# Altium PCB Driver.PcbDoc
Units mm, origin at the board's own origin, x right, y up, seen from the top; angles counter-clockwise.
Board outline 50.3 x 55.5 mm, 2 copper layers (Top Layer, Bottom Layer); 21 components, 12 nets, 64 pads, 4 vias.
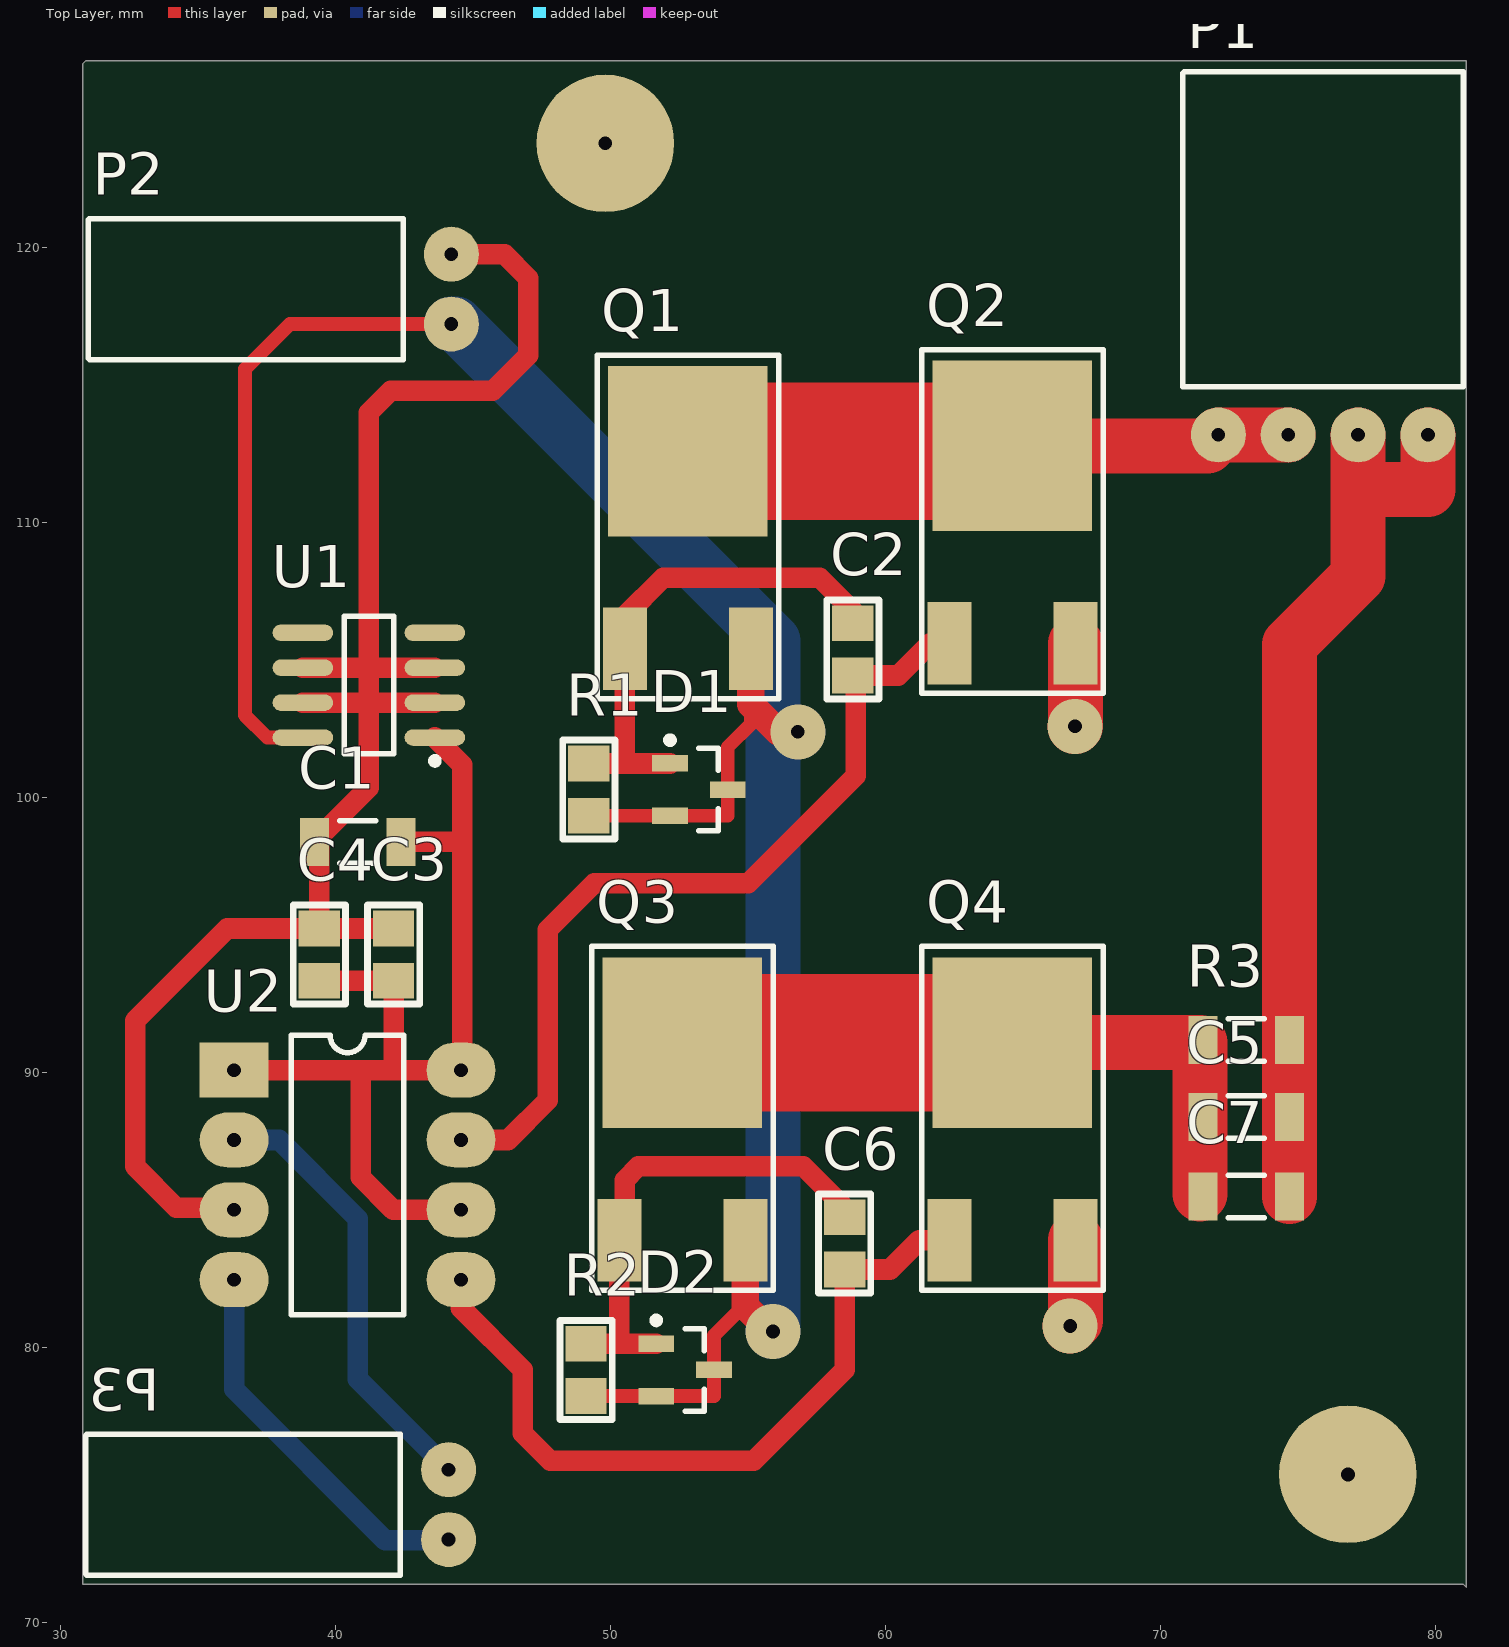
[diagram p0: Top Layer view]
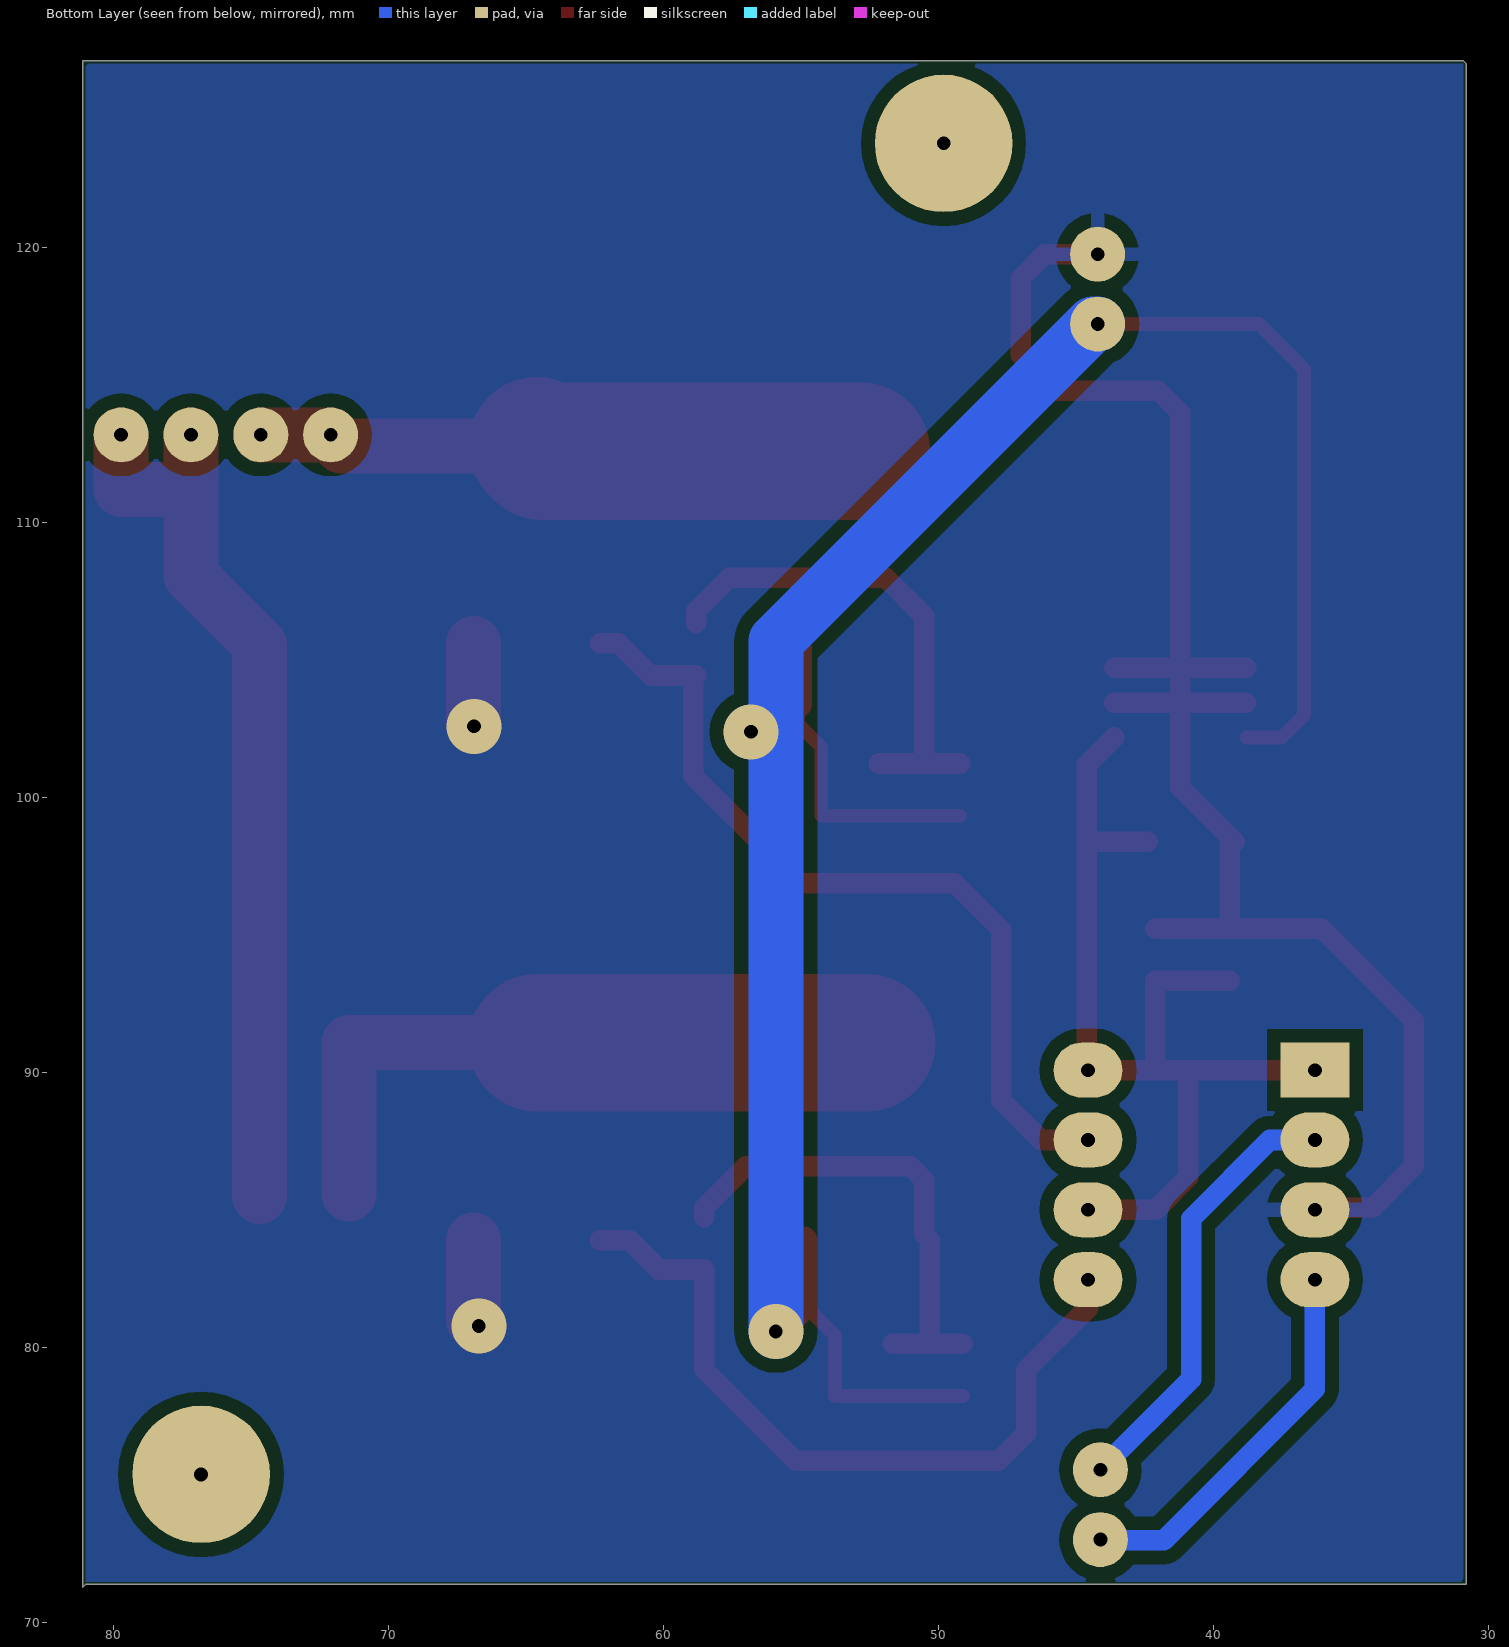
[diagram p1: Bottom Layer view, seen from below]

## Layer stack, top to bottom
Top Layer: signal copper 0.0356
Dielectric: dielectric 0.32, FR-4, Dk 4.8
Bottom Layer: signal copper 0.0356

## Board outline
30.8,126.7 30.9,126.8 81.1,126.8 81.1,71.3 81,71.4 30.8,71.4

## Design rules (kind name [scope] priority, off if disabled: settings)
Clearance "Clearance_GND_VCC +3.3" [InNet('GND') vs InNet('VCC +3.3')] p1 off: gap=0.2
Clearance Clearance_U3_Trace [(IsTrack  And IsNet)  And InRegion(3815,3770 ,4275 ,4280) vs (IsTrack  And IsNet)  And InRegion(3815,3770 ,4275 ,4280)] p2: gap=0.2
Clearance Clearance_QFP_NET [InNet('SPI_MISO/DO','SPI_MOSI/DI','GND','VCC','GDO2','GDO0','SPI_SS','SPI_SCK','NetC3_1','NetC2_1','GND','NetC1_2','NetANT1_1','NetR1_2')  And InRegion(3815,3770 ,4275 ,4280) vs InNet('SPI_MISO','SPI_MOSI','GND','VCC','GDO2','GDO0','SPI_SS','SPI_SCK','NetC3_1','NetC2_1','GND')  And InRegion(3815,3770 ,4275 ,4280)] p3: gap=0.2
Clearance Clearance_QFP_Pins [InComponent('U1') And IsPad] p4: gap=0.2
Clearance Clearance_GND [InPolygon] p5: gap=0.5
Clearance [All] p6: gap=0.3
ComponentClearance ComponentClearance_R1_C10 [InComponent('C10') vs InComponent('R1')] p1 off: gap=0 collisioncheckmode=3 verticalgap=0 showdistances=FALSE
ComponentClearance [All] p2 off: gap=0.3 collisioncheckmode=3 verticalgap=0.3 showdistances=FALSE
HoleSize [All] p1: absolutevalues=TRUE maxlimit=5 minlimit=0.3 maxpercent=80.000 minpercent=20.000
NetAntennae [All] p1: netantennaetolerance=50
PlaneConnect [All] p1: planeconnectstyle=Relief reliefexpansion=0.508 reliefentries=4 reliefconductorwidth=0.3 reliefairgap=0.3
PolygonConnect [All] p1: connectstyle=Relief reliefconductorwidth=0.5 reliefentries=4 polygonreliefangle="90 Angle"
RoutingCorners [All] p1: cornerstyle=45-Degree minsetback=2.54 maxsetback=5
RoutingVias [All] p1: holewidth=0.5 width=1.6 viastyle="Through Hole" minholewidth=0.3 minwidth=1 maxholewidth=1 maxwidth=2
ShortCircuit ShortCircuit_ANT1 [InComponent('ANT1')] p1: allowed=TRUE
ShortCircuit [All] p2: allowed=FALSE
SilkToSilkClearance [All] p1: silktosilkclearance=0.3
SilkscreenOverComponentPads [All] p1: minsilkscreentomaskgap=0.254
SolderMaskExpansion [All] p1: expansion=0.102
Width [All] p1: maxlimit=15 minlimit=0.2 preferedwidth=0.3
20 further rules are at their usual default settings.

## Components (designator, comment, footprint, x,y, rotation, side; value= is the part's Value field where it differs from the comment)
C1 "SMD_1206" SMD-1206 40.8,98.4 r180 top
C2 "KONDENS_SMD" C0805 58.8,105.4 r270 top
C3 "KONDENS_SMD" C0805 42.1,94.3 r270 top
C4 "KONDENS_SMD" C0805 39.4,94.3 r270 top
C5 "SMD_1206" SMD-1206 73.1,88.4 r0 top
C6 "KONDENS_SMD" C0805 58.5,83.8 r270 top
C7 "SMD_1206" SMD-1206 73.1,85.5 r0 top
D1 "BAT54S" SOT23_N 53.2,100.3 r0 top
D2 "BAT54S" SOT23_N 52.7,79.2 r0 top
P1 "WF-04MR" WF-04MR 75.9,113.2 r0 top
P2 "WF-02MR" WF-02MR 44.2,118.5 r90 top
P3 "WF-02MR" WF-02MR 44.1,74.3 r270 top
Q1 "NTD20P06L" DPAK 52.8,112.6 r0 top
Q2 "NTD20N06L" DPAK 64.6,112.8 r0 top
Q3 "NTD20P06L" DPAK 52.6,91.1 r0 top
Q4 "NTD20N06L" DPAK 64.6,91.1 r0 top
R1 "RES" C0805 49.2,100.3 r270 top
R2 "RES" C0805 49.1,79.2 r270 top
R3 "1206" SMD-1206 73.1,91.2 r180 top
U1 "MC78L09ACD" 751-05_N 41.2,104.1 r180 top
U2 "UCC27423" PDIP 36.3,90.1 r0 top

## Footprints (in the part's own frame and the unit in brackets; to place one, negate y for a bottom-side part, rotate by r counter-clockwise, add the part's x,y. Pads: shape width x height; smd on the part's side, far side on the other; paste and mask are expansions set on the pad)
751-05_N [mm] "SOIC, 8-Leads, Body 4.9x3.9mm, Pitch 1.27mm, IPC Medium Density"
  oval 2.2x0.6 smd: 1(-2.4,1.905) 2(-2.4,0.635) 3(-2.4,-0.635) 4(-2.4,-1.905) 5(2.4,-1.905) 6(2.4,-0.635) 7(2.4,0.635) 8(2.4,1.905)
  silkscreen extent -2.53,-2.5 0.9,2.88, body extent -1.95,-2.45 1.95,2.45, height 1.75
C0805 [mm]
  rect 1.3x1.5 smd: 1(-0.95,0) 2(0.95,0)
  silkscreen extent -1.8,-0.95 1.8,0.95
DPAK [mm]
  rect 5.8x6.2 smd: D(0,0)
  rect 1.6x3 smd: G(-2.29,-7.18) S(2.29,-7.18)
  silkscreen extent -3.3,-9 3.3,3.5
PDIP [mm]
  rect 2.5x2 hole 0.5: 1(0,0)
  oval 2.5x2 hole 0.5: 2(0,-2.54) 3(0,-5.08) 4(0,-7.62) 5(8.25,-7.62) 6(8.25,-5.08) 7(8.25,-2.54) 8(8.25,0)
  silkscreen extent 2.08,-8.89 6.16,1.27
SMD-1206 [mm] "Chip Resistor, 2-Leads, Body 3,3x1,6mm, IPC Medium Density"
  rect 1.05x1.75 smd: 1(-1.575,0) 2(1.575,0)
  silkscreen extent -0.65,-0.77 0.65,0.77, body extent -1.65,-0.81 1.65,0.81, height 0.5
SOT23_N [mm] "SOT23, 3-Leads, Body 2.9x1.3mm, Pitch 0.95mm, Lead Span 2.3mm, IPC Medium Density"
  rect 1.3x0.6 smd: 1(-1.05,0.95) 2(-1.05,-0.95) 3(1.05,0)
  silkscreen extent -1.17,-1.5 0.7,1.92, body extent -0.7,-1.5 0.7,1.5, height 1.1
WF-02MR [mm]
  round 2 hole 0.5: 1(-1.27,0) 2(1.27,0)
  silkscreen extent -2.56,1.75 2.56,13.2
WF-04MR [mm]
  round 2 hole 0.5: 1(-3.81,0) 2(-1.27,0) 3(1.27,0) 4(3.81,0)
  silkscreen extent -5.1,1.75 5.1,13.2

## Part data
C1 C5 C7: library part "Capasitor SMD_1206"
D1 D2: "Schottky Barrier Double Diode"
R1 R2: "Resistor"
R3: library part "Resistor SMD_1206"
U1: "Three-Terminal Low Current Positive Voltage Regulator"

## Free pads (board coordinates)
  round 5 hole 0.5: 0(76.8,75.4) 1(49.8,123.8)

## Via types
v1: diameter 2, hole 0.5, Top Layer to Bottom Layer, 4 vias

## Nets (pads, with @x,y where several pads share a name; then routed paths per layer and width w, separated by ;. In a path a pad name is that pad's centre, name@x,y a point inside that pad or via, vN(x,y) a via of type N, cw(c..) or ccw(c..) an arc to the next point about the centre after c; other vN are vias at no path point)
GND: C1.2 C3.1 C4.1 P2.2 Q2.S Q4.S U1.2 U1.3 U1.6 U1.7 U2.3 | length 68.5
  Top Layer w0.75: U2.3 36.22,85.1 34.2,85.1 32.7,86.6 32.7,91.9 36.05,95.25 C4.1 ; U1.7 41.195,103.465 41.2,103.47 ; U1.6 41.135,104.735 41.2,104.8 ; C3.1 C4.1 ; U1.2 41.265,103.465 41.23,103.5 41.2,103.47 ; U1.3 41.265,104.735 41.2,104.8 ; P2.2 46.13,119.77 47,118.9 47,116.1 45.7,114.8 42,114.8 41.2,114 41.2,104.8 ; C4.1 39.4,98.225 C1.2 41.2,100.375 41.2,103.47 ; 41.2,103.47 41.2,104.8
  Top Layer w2: v1(66.7,80.8) 66.89,80.99 Q4.S ; v1(66.88,102.6) 66.89,102.61 Q2.S
NetC2_1: C2.1 D1.1 Q1.G R1.1 | length 18.1
  Top Layer w0.75: R1.1 50.5,101.25 ; D1.1 50.5,101.25 ; C2.1 58.8,106.8 57.6,108 51.9,108 50.51,106.61 Q1.G 50.51,101.26 50.5,101.25
NetC2_2: C2.2 Q2.G U2.7 | length 31.2
  Top Layer w0.75: U2.7 46.26,87.56 47.7,89 47.7,95.2 49.4,96.9 55,96.9 58.9,100.8 58.9,104.35 C2.2 60.45,104.45 61.62,105.62 Q2.G
NetC5_1: C5.1 C7.1 Q3.D Q4.D R3.2 | length 24.3
  Top Layer w2: Q4.D 71.425,91.1 C7.1@71.425,85.6
  Top Layer w5: Q3.D Q4.D
NetC5_2: C5.2 C7.2 P1.3 P1.4 R3.1 | length 33.3
  Top Layer w2: C7.2 C5.2 R3.1 74.675,105.575 77.17,108.07 77.17,111.1 ; P1.3 77.17,111.1 ; P1.4 79.71,111.21 77.28,111.21 77.17,111.1
NetC6_1: C6.1 D2.1 Q3.G R2.1 | length 17.8
  Top Layer w0.75: R2.1 50.3,80.15 ; D2.1 50.3,80.15 ; C6.1 58.5,85.1 57,86.6 51,86.6 50.5,86.1 50.5,84.11 Q3.G 50.31,80.16 50.3,80.15
NetC6_2: C6.2 Q4.G U2.5 | length 27.9
  Top Layer w0.75: U2.5 44.55,81.45 46.8,79.2 46.8,76.9 47.8,75.9 55.2,75.9 58.5,79.2 C6.2 60.15,82.85 61.22,83.92 Q4.G
NetP1_1: P1.1 P1.2 Q1.D Q2.D | length 22.1
  Top Layer w2: Q2.D 71.69,112.8 P1.1 P1.2
  Top Layer w5: Q1.D 64.4,112.6 Q2.D
NetP3_1: P3.1 U2.2 | length 16.2
  Bottom Layer w0.75: U2.2 37.94,87.56 40.8,84.7 40.8,78.87 P3.1
NetP3_2: P3.2 U2.4 | length 14.1
  Bottom Layer w0.75: U2.4 36.3,78.5 41.8,73 44.07,73 P3.2
VCC_9V: C1.1 C3.2 C4.2 U1.1 U2.1 U2.6 U2.8 | length 37
  Top Layer w0.75: U2.1 40.9,90.1 ; C4.2 C3.2 42.1,90.1 ; C1.1 44.6,98.4 ; U1.1 44.6,101.195 44.6,98.4 ; U2.6 42.08,85.02 40.9,86.2 40.9,90.1 ; 40.9,90.1 42.1,90.1 ; 42.1,90.1 U2.8 44.6,90.15 44.6,98.4
VGDT: D1.2 D1.3 D2.2 D2.3 P2.1 Q1.S Q3.S R1.2 R2.2 U1.8 | length 91.4
  Top Layer w0.5: U1.8 37.505,102.195 36.7,103 36.7,115.6 38.33,117.23 P2.1 ; R2.2 53.75,78.25 D2.3 53.75,80.45 54.89,81.59 ; R1.2 D1.2 54.25,99.35 D1.3 54.25,101.85 55.09,102.69 55.09,103.4
  Top Layer w1: Q3.S 54.89,81.59 54.89,81.51 55.8,80.6 v1(55.9,80.6) ; Q1.S 55.09,103.4 56.09,102.4 v1(56.8,102.4)
  Bottom Layer w2: P2.1 44.37,117.23 55.9,105.7 v1(55.9,80.6) ; v1@56,102.4 v1(56.8,102.4)
pads on no net: U1.4 U1.5

## Polygon pours and split planes (outlines as drawn)
GND on Bottom Layer "TOP" (solid, remove dead copper, pour order 2): 30.9,126.7 80.9,126.7 81,126.6 81,71.5 31,71.5 30.9,71.6